# EAGLE board Alarmanlage_V40 (EAGLE 6.5.0)
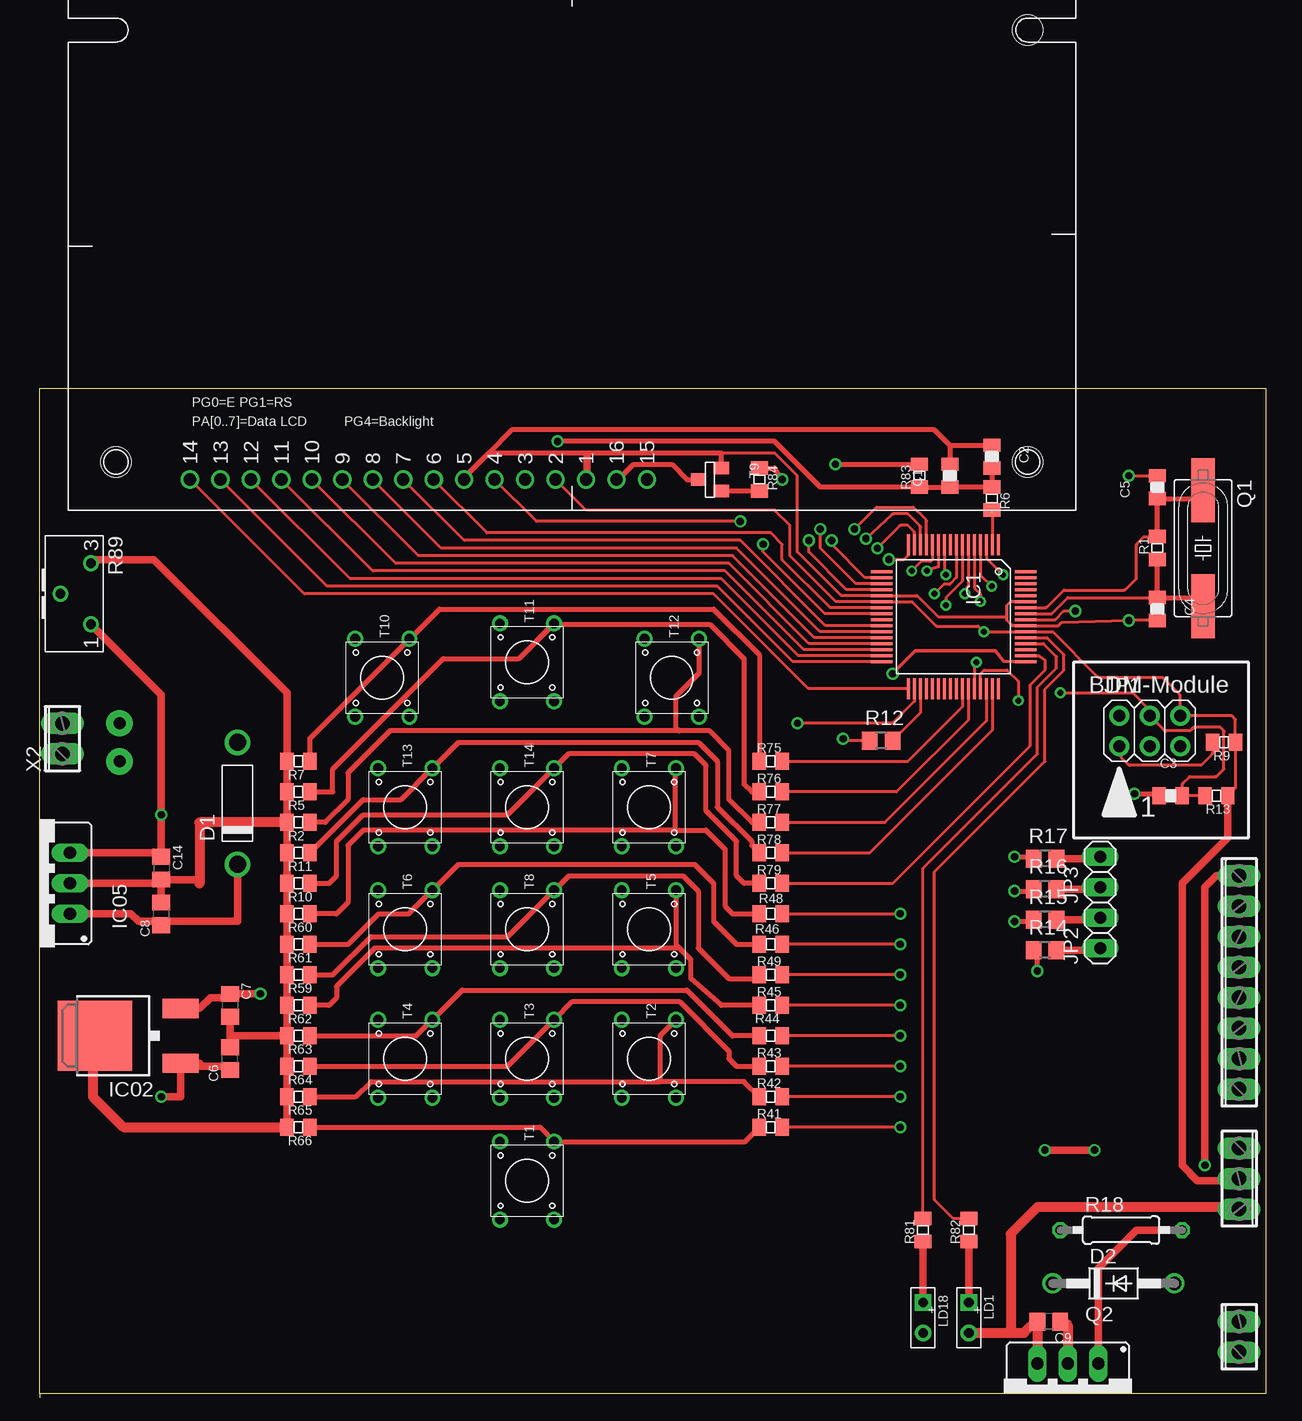
[diagram p0: board, top side]
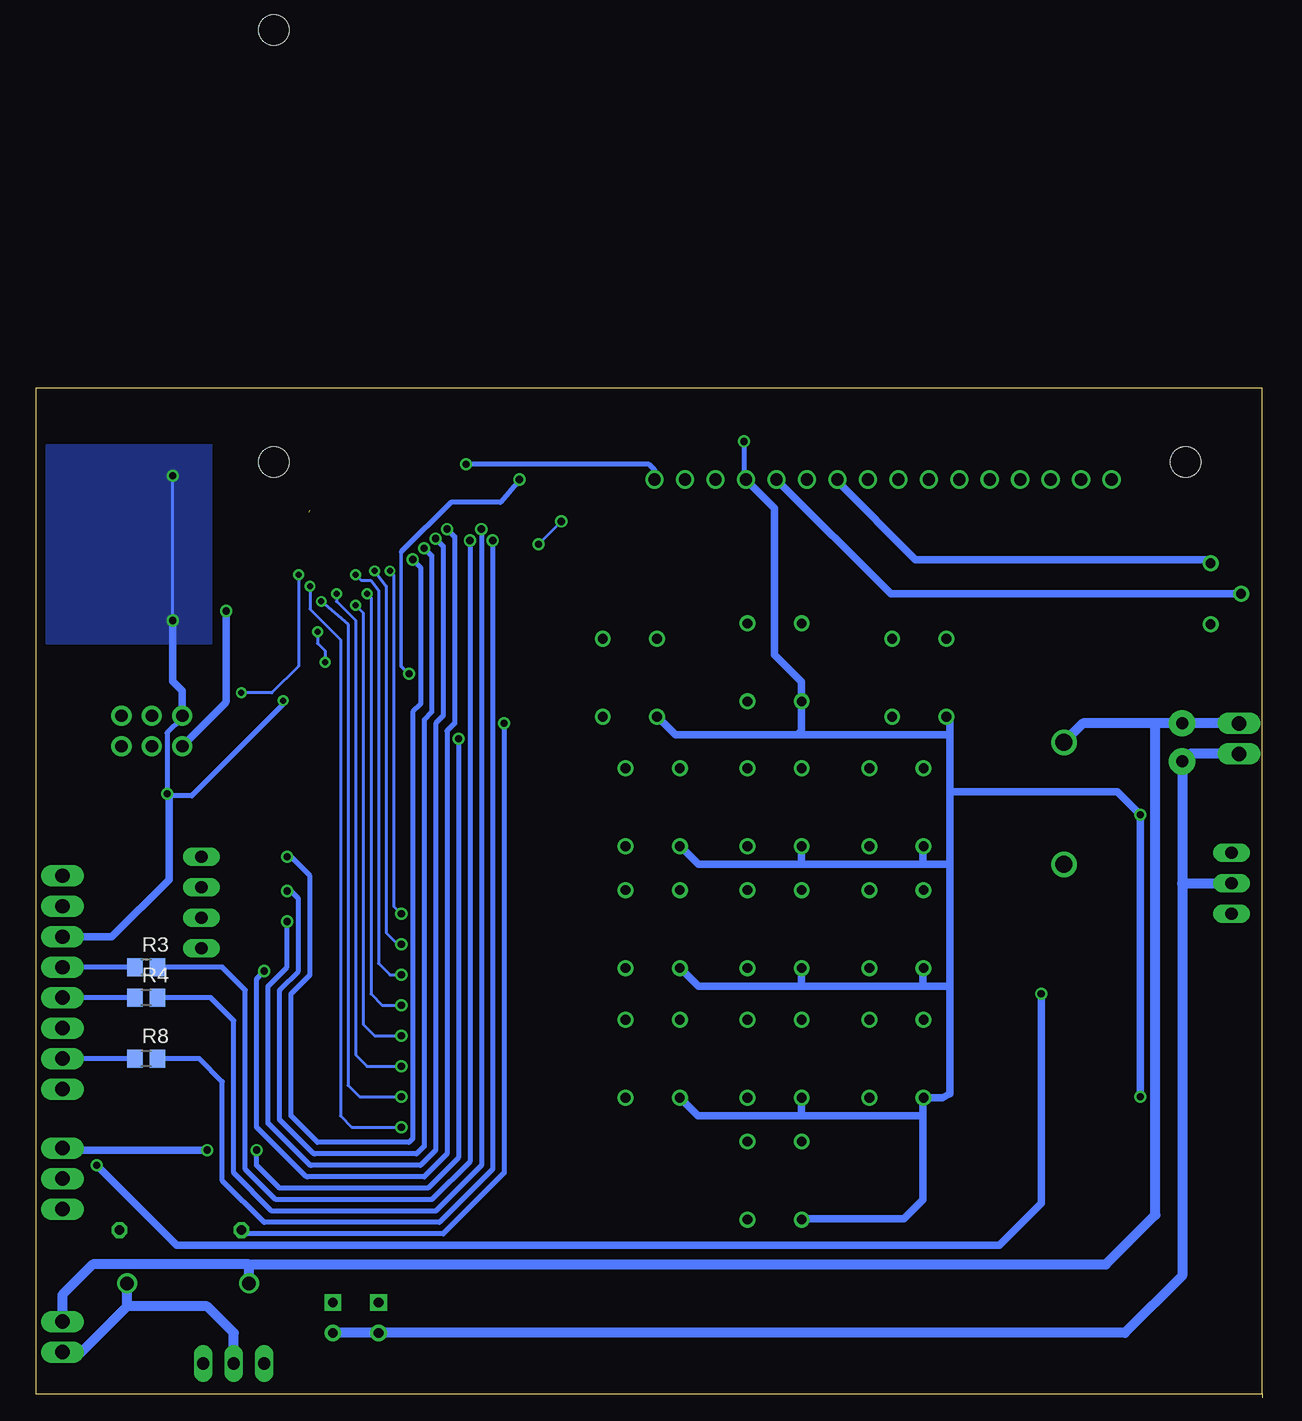
[diagram p1: board, bottom side, seen from below]

No outline drawn. Coordinates in mm, seen from the top.
Copper layers (1*16): Top 0.035mm / dielectric 1.5mm / Bottom 0.035mm
Design rules "default": minimum track width 10mil, minimum drill 24mil, track to track 8mil, track to pad 8mil, pad to pad 8mil, via to via 8mil, smd to smd 8mil, copper to edge 40mil, drill to drill 8mil, minimum pad ring 10mil, minimum via ring 8mil, stop-mask expansion 4mil, vias tented up to drill 0mil, thermal gap 10mil
Milling: 5 lines

## Footprints (pad centres in the part's own frame; a part is rotated, then mirrored left to right if it is on the bottom)
0805F = smd 1.118 x 1.422: 1 -0.953,0; 2 0.953,0
C0805 = smd 1.3 x 1.5: 1 -0.95,0; 2 0.95,0
DO201 = drill 1.422: A 5.08,0; K -5.08,0
DO41-10 = drill 1.118: A 5.08,0; C -5.08,0
LQFP64 = smd 1.778 x 0.254: 1 -6,3.75; 2 -6,3.25; 3 -6,2.75; 4 -6,2.25; 5 -6,1.75; 6 -6,1.25; 7 -6,0.75; 8 -6,0.25; 9 -6,-0.25; 10 -6,-0.75; 11 -6,-1.25; 12 -6,-1.75; 13 -6,-2.25; 14 -6,-2.75; 15 -6,-3.25; 16 -6,-3.75; 33 6,-3.75; 34 6,-3.25; 35 6,-2.75; 36 6,-2.25; 37 6,-1.75; 38 6,-1.25; 39 6,-0.75; 40 6,-0.25; 41 6,0.25; 42 6,0.75; 43 6,1.25; 44 6,1.75; 45 6,2.25; 46 6,2.75; 47 6,3.25; 48 6,3.75 | smd 0.254 x 1.778: 17 -3.75,-6; 18 -3.25,-6; 19 -2.75,-6; 20 -2.25,-6; 21 -1.75,-6; 22 -1.25,-6; 23 -0.75,-6; 24 -0.25,-6; 25 0.25,-6; 26 0.75,-6; 27 1.25,-6; 28 1.75,-6; 29 2.25,-6; 30 2.75,-6; 31 3.25,-6; 32 3.75,-6; 49 3.75,6; 50 3.25,6; 51 2.75,6; 52 2.25,6; 53 1.75,6; 54 1.25,6; 55 0.75,6; 56 0.25,6; 57 -0.25,6; 58 -0.75,6; 59 -1.25,6; 60 -1.75,6; 61 -2.25,6; 62 -2.75,6; 63 -3.25,6; 64 -3.75,6
DPACK = smd 1.6 x 3: 1 -2.28,-4.8; 3 2.28,-4.8 | smd 5.8 x 6.2: 4 0,2.38
TO-220_V = drill 1.016 long: GND 0,-2.54; IN -2.54,-2.54; OUT 2.54,-2.54
2X03 = drill 1.016 pad 1.676: 1 -2.54,-1.27; 2 -2.54,1.27; 3 0,-1.27; 4 0,1.27; 5 2.54,-1.27; 6 2.54,1.27
1X02 = drill 1.016 long: 1 -1.27,0; 2 1.27,0
LED2X5MM = drill 0.813 pad 1.397: 1 1.27,0 | drill 0.813 pad 1.397 square: 2 -1.27,0
HC49UP = smd 5.334 x 1.93: 1 -4.826,0; 2 4.826,0
0805 = smd 1.118 x 1.422: 1 -0.953,0; 2 0.953,0
R0805 = smd 1.3 x 1.5: 1 -0.95,0; 2 0.95,0
0207/10 = drill 0.813 octagon: 1 -5.08,0; 2 5.08,0
S63X = drill 0.813: 1 2.54,0; 2 0,-2.54; 3 -2.54,0
TASTE_THT = drill 0.813: A1 -3.251,2.261; A2 3.251,2.261; B1 -3.251,-2.261; B2 3.251,-2.261
SOT-23 = smd 1.016 x 1.27: 1 -0.953,0.953; 2 0.953,0.953; 3 0,-0.953
8POL254 = drill 1.2 long: 1 -8.89,0; 2 -6.35,0; 3 -3.81,0; 4 -1.27,0; 5 1.27,0; 6 3.81,0; 7 6.35,0; 8 8.89,0
2POL254 = drill 1.2 long: 1 -1.27,0; 2 1.27,0
3POL254 = drill 1.2 long: 1 -2.54,0; 2 0,0; 3 2.54,0
FDCC1602E = drill 1.016: 1 43.18,2.54; 2 40.64,2.54; 3 38.1,2.54; 4 35.56,2.54; 5 33.02,2.54; 6 30.48,2.54; 7 27.94,2.54; 8 25.4,2.54; 9 22.86,2.54; 10 20.32,2.54; 11 17.78,2.54; 12 15.24,2.54; 13 12.7,2.54; 14 10.16,2.54; 15 48.26,2.54; 16 45.72,2.54 | hole 2.54: 4,4; 80,4; 80,40

## Placement (x,y rotation side)
C1  100nF  [0805F]  76.52,76.83 90 top
C2  100nF  [0805F]  80.01,78.42 270 top
C3  100nF  [0805F]  94.93,50.16 0 top
C4  10pF  [0805F]  93.82,65.72 270 top
C5  10pF  [0805F]  93.82,75.88 90 top
C6  330nF  [C0805]  16.51,28.26 90 top
C7  100nF  [C0805]  16.51,32.7 270 top
C8  330nF  [C0805]  10.79,40.32 90 top
C9  100nF  [C0805]  84.77,6.35 180 top
C14  100nF  [C0805]  10.79,44.13 270 top
D1  1N4007  [DO201]  17.14,49.53 90 top
D2  1N4004  [DO41-10]  90.17,9.53 0 top
IC1  MC9S08AW60  [LQFP64]  76.83,65.09 270 top
IC02  3.3V  [DPACK]  7.62,30.16 90 top
IC05  5V  [TO-220_V]  0.64,42.86 90 top
JP1  [2X03]  93.19,55.56 0 top
JP2  [1X02]  89.06,38.73 90 top
JP3  [1X02]  89.06,43.81 90 top
LD1  GREEN  [LED2X5MM]  78.11,6.67 270 top
LD18  RED  [LED2X5MM]  74.3,6.67 270 top
Q1  4M9152  [HC49UP]  97.63,70.8 270 top
Q2  P5N50D  [TO-220_V]  86.36,0.32 180 top
R1  1M  [0805]  93.82,70.8 270 top
R2  10k  [0805]  22.23,47.94 0 top
R3  [R0805]  93.66,35.88 180 bottom
R4  [R0805]  93.66,33.34 180 bottom
R5  10k  [0805]  22.23,50.48 0 top
R6  10k  [0805]  80.01,74.93 90 top
R7  10k  [0805]  22.23,53.02 0 top
R8  [R0805]  93.66,28.26 180 bottom
R9  10k  [0805]  99.38,54.61 0 top
R10  10k  [0805]  22.23,42.86 0 top
R11  10k  [0805]  22.23,45.4 0 top
R12  1k  [R0805]  70.8,54.77 180 top
R13  10k  [0805]  98.74,50.16 0 top
R14  1k  [R0805]  84.45,37.31 180 top
R15  1k  [R0805]  84.45,39.85 180 top
R16  1k  [R0805]  84.45,42.39 180 top
R17  1k  [R0805]  84.45,44.93 180 top
R18  [0207/10]  90.81,13.97 0 top
R41  1k  [0805]  61.59,22.54 180 top
R42  1k  [0805]  61.59,25.08 180 top
R43  1k  [0805]  61.59,27.62 180 top
R44  1k  [0805]  61.59,30.16 180 top
R45  1k  [0805]  61.59,32.7 180 top
R46  1k  [0805]  61.59,37.78 180 top
R48  1k  [0805]  61.59,40.32 180 top
R49  1k  [0805]  61.59,35.24 180 top
R59  10k  [0805]  22.23,35.24 0 top
R60  10k  [0805]  22.23,40.32 0 top
R61  10k  [0805]  22.23,37.78 0 top
R62  10k  [0805]  22.23,32.7 0 top
R63  10k  [0805]  22.23,30.16 0 top
R64  10k  [0805]  22.23,27.62 0 top
R65  10k  [0805]  22.23,25.08 0 top
R66  10k  [0805]  22.23,22.54 0 top
R75  1k  [0805]  61.59,53.02 180 top
R76  1k  [0805]  61.59,50.48 180 top
R77  1k  [0805]  61.59,47.94 180 top
R78  1k  [0805]  61.59,45.4 180 top
R79  1k  [0805]  61.6,42.87 180 top
R81  1k  [0805]  74.3,13.97 270 top
R82  1k  [0805]  78.11,13.97 270 top
R83  100R  [0805]  73.98,76.83 270 top
R84  1k  [0805]  60.64,76.52 90 top
R89  10k  [S63X]  4.92,66.99 270 top
T1  [TASTE_THT]  41.27,18.1 90 top
T2  [TASTE_THT]  51.44,28.26 90 top
T3  [TASTE_THT]  41.27,28.26 90 top
T4  [TASTE_THT]  31.11,28.26 90 top
T5  [TASTE_THT]  51.44,39.05 90 top
T6  [TASTE_THT]  31.11,39.05 90 top
T7  [TASTE_THT]  51.44,49.21 90 top
T8  [TASTE_THT]  41.27,39.05 90 top
T9  [SOT-23]  56.52,76.52 270 top
T10  [TASTE_THT]  29.21,60.01 90 top
T11  [TASTE_THT]  41.27,61.28 90 top
T12  [TASTE_THT]  53.34,60.01 90 top
T13  [TASTE_THT]  31.11,49.21 90 top
T14  [TASTE_THT]  41.27,49.21 90 top
X1  [8POL254]  100.65,34.61 90 top
X2  [2POL254]  2.54,54.93 90 top
X3  [2POL254]  100.65,5.08 90 top
X4  [3POL254]  100.65,18.26 270 top
X10  [FDCC1602E]  3.02,73.98 0 top

## Library data of the parts
C1-C5 D1 LD1 LD18 R1 R2 R5-R7 R9-R11 R13 R41-R46 R48 R49 R59-R66 R75-R79 R81-R84 T1-T14 = deto
C6-C9 C14 D2 IC05 Q2 R3 R4 R8 R12 R14-R18 = lib_valentin_bernard
IC1 = MOTOROLA
IC02 = v-reg
JP1-JP3 = pinhead
Q1 = crystal
R89 = pot
X1-X4 = con-phoenix-254; OC_FARNELL: unknown; OC_NEWARK: unknown
X10 = DISP-LCD

## Nets
+3V3: C7.1 IC02.3 X1.8
+5V: C1.1 C2.2 C6.1 C14.1 IC1.22 IC1.44 IC1.54 IC02.1 IC05.OUT JP1.6 R6.2 R9.2 R13.2 R83.2 R89.1 T1.A1 T2.A1 T3.A1 T4.A1 T5.A1 T6.A1 T7.A1 T8.A1 T10.A1 T11.A1 T12.A1 T13.A1 T14.A1 X4.2 X10.2
+12V: D1.A D2.C X2.2 X3.2
BKGD: IC1.56 JP1.1 R9.1
D0: IC1.26 X10.7
D1: IC1.27 X10.8
D2: IC1.28 X10.9
D3: IC1.29 X10.10
GND: C1.2 C2.1 C3.1 C4.2 C5.2 C6.2 C7.2 C8.2 C9.2 C14.2 IC1.21 IC1.45 IC1.55 IC1.59 IC02.4 IC05.GND JP1.2 LD1.1 LD18.1 Q2.OUT R2.1 R5.1 R7.1 R10.1 R11.1 R59.1 R60.1 R61.1 R62.1 R63.1 R64.1 R65.1 R66.1 R89.3 T9.1 X1.6 X2.1 X4.3 X10.1 X10.5
IRQ: IC1.2 R6.1
LCD_LED: IC1.49 R84.2
N$1: R3.2 X1.5
N$2: C8.1 D1.K IC05.IN
N$3: IC1.20 R8.1
N$4: IC1.42 R75.1
N$5: IC1.19 R4.1
N$6: IC1.18 R3.1
N$8: IC1.43 R76.1
N$9: IC1.46 R77.1
N$10: IC1.47 R78.1
N$11: R49.2 R59.2 T8.B2
N$12: IC1.50 R79.1
N$14: R7.2 R75.2 T10.B2
N$15: R4.2 X1.4
N$16: C4.1 IC1.57 Q1.2 R1.2
N$17: IC1.52 R81.1
N$18: IC1.53 R82.1
N$19: R8.2 X1.2
N$20: R5.2 R76.2 T11.B2
N$21: IC1.12 R48.1
N$22: C5.1 IC1.58 Q1.1 R1.1
N$23: IC1.11 R46.1
N$24: IC1.4 R41.1
N$25: R12.2 X4.1
N$26: LD1.2 R82.2
N$27: IC1.13 R14.2
N$28: C9.1 D2.A Q2.GND X3.1
N$29: R11.2 R78.2 T13.B2
N$30: LD18.2 R81.2
N$31: IC1.35 R12.1
N$32: IC1.14 R15.2
N$33: R10.2 R79.2 T14.B2
N$34: IC1.15 R16.2
N$35: R45.2 R62.2 T5.B2
N$36: IC1.34 R18.1
N$37: R48.2 R60.2 T7.B2
N$38: IC1.16 R17.2
N$39: JP2.1 R14.1
N$40: JP2.2 R15.1
N$41: JP3.1 R16.1
N$42: IC1.10 R49.1
N$43: JP3.2 R17.1
N$44: Q2.IN R18.2
N$45: IC1.5 R42.1
N$46: IC1.6 R43.1
N$47: IC1.7 R44.1
N$48: IC1.8 R45.1
N$49: IC1.30 X10.11
N$50: IC1.31 X10.12
N$51: IC1.32 X10.13
N$52: IC1.33 X10.14
N$55: IC1.23 X10.6
N$58: IC1.24 X10.4
N$60: R89.2 X10.3
N$63: R46.2 R61.2 T6.B2
N$66: R44.2 R63.2 T4.B2
N$67: R43.2 R64.2 T3.B2
N$68: R42.2 R65.2 T2.B2
N$69: R41.2 R66.2 T1.B2
N$72: R2.2 R77.2 T12.B2
N$86: R83.1 X10.15
N$87: T9.3 X10.16
N$88: R84.1 T9.2
RESET: C3.2 IC1.3 JP1.4 R13.1

## Tracks (layer width: path | path; a pad name or v marks a point on that pad's centre or on a via)
+3V3  (via drill 0.6)
  Top 0.254: 16.51,33.34 C7.1
  Top 0.61: IC02.3 13.97,32.44 14.92,33.34 16.51,33.34 | C7.1 v19.05,33.65 v19.05,33.66 | v97.79,19.37 97.79,42.55 98.74,43.5 X1.8
  Bottom 0.61: v19.05,33.66 19.05,16.19 22.54,12.7 91.12,12.7 v97.79,19.37
+5V  (via drill 0.5, 0.6)
  Top 0.254: X10.2 46.2,73.98 61.91,73.98 63.18,72.71 63.18,70.17 67.01,66.34 IC1.22 73.36,66.34 75.41,64.29 78.9,64.29 v79.38,63.82 82.81,63.82 IC1.54 | JP1.6 100.01,56.83 100.33,56.52 R9.2 100.33,50.91 arc-45 100.26,50.73 R13.2 | JP1.6 | IC1.54 83.14,63.84 | JP1.6 95.73,58.47 arc45 95.65,58.65 94.3,60.01 89,60.01 arc-45 88.83,60.08 85.09,63.82 arc45 85.04,63.84 IC1.54 | v78.74,61.28 78.58,61.12 IC1.44
  Top 0.406: v43.81,79.69 61.91,79.69 65.72,75.88 R83.2 C1.1 R6.2 C2.2
  Top 0.61: IC05.OUT 10.79,45.4 C14.1 v10.79,48.58 10.79,58.58 R89.1 | v10.79,25.08 12.42,25.08 IC02.1 13.97,27.88 13.97,27.62 16.51,27.62 C6.1 | R13.2 99.69,46.67 95.89,42.86 95.89,19.37 97.16,18.1 100.17,18.1 X4.2
  Bottom 0.254: v79.38,63.82 79.38,62.87 78.74,62.23 v78.74,61.28
  Bottom 0.406: v43.81,79.69 43.81,76.68 X10.2
  Bottom 0.61: 10.79,25.01 v10.79,25.08 v10.79,48.58 12.7,50.48 26.67,50.48 | 39.05,23.5 39.01,23.5 | 39.01,23.5 T3.A1 39.05,25.01 39.05,23.5 | 39.01,23.5 28.89,23.5 | T1.A1 38.81,14.85 38.73,14.92 30.48,14.92 28.89,16.51 28.89,23.5 | 39.05,23.5 47.66,23.5 T2.A1 | T5.A1 49.14,35.8 47.62,34.29 39.05,34.29 | 39.05,34.29 39.05,35.76 T8.A1 | 39.05,34.29 28.89,34.29 | 28.89,34.29 28.89,35.76 T6.A1 | T7.A1 49.14,45.96 47.62,44.45 39.05,44.45 | 39.05,44.45 39.05,45.92 T14.A1 | 39.05,44.45 28.89,44.45 | 28.89,44.45 28.89,45.92 T13.A1 | 28.89,34.29 26.67,34.29 | 26.67,34.29 26.67,25.32 27.3,25.01 T4.A1 28.89,24.97 28.89,23.5 | 28.89,44.45 26.67,44.45 | T10.A1 26.91,56.76 26.67,56.52 26.67,55.24 | 26.67,55.24 26.67,50.48 | 26.67,50.48 26.67,44.45 | T12.A1 51.04,56.76 49.53,55.24 39.37,55.24 | 39.37,55.24 26.67,55.24 | 39.37,55.24 39.01,55.6 T11.A1 39.01,59.65 41.27,61.91 41.27,74.14 X10.2 | 26.67,34.29 26.67,44.45
+12V  (via drill 1 pad 2.18)
  Bottom 0.813: X2.2 v7.3,56.2 9.53,56.2 | 9.53,56.2 15.56,56.2 D1.A | 85.09,11.11 13.65,11.11 9.53,15.24 9.53,56.2 | D2.C 85.09,11.11 | 85.09,11.11 98.11,11.11 100.65,8.57 X3.2
BKGD  (via drill 0.6)
  Top 0.254: R9.1 98.42,53.76 arc-45 98.35,53.58 97.47,52.7 91.55,52.7 arc-45 91.37,52.78 90.81,53.34 90.81,54.03 arc45 90.73,54.21 JP1.1 | IC1.56 85.32,64.84 86.04,65.56 v87,65.56
  Bottom 0.254: 87,58.05 arc45 87.07,57.87
  Bottom 0.61: v87,65.56 87,58.05 | 87.07,57.87 JP1.1
D0
  Top 0.254: IC1.26 66.16,64.34 59.05,71.44 36.04,71.44 X10.7
D1
  Top 0.254: IC1.27 65.7,63.84 58.74,70.8 34.13,70.8 X10.8
D2
  Top 0.254: IC1.28 65.25,63.34 58.42,70.17 32.23,70.17 X10.9
D3
  Top 0.254: IC1.29 64.8,62.84 58.1,69.53 30.32,69.53 X10.10
GND  (via drill 0.5, 0.6, 1 pad 2.18)
  Top 0.254: 57.47,78.74 61.91,78.74 63.82,76.83 63.82,70.48 67.47,66.84 IC1.21 73.81,66.84 75.56,65.09 81.28,65.09 | C4.2 v91.44,64.77 | v91.44,64.77 arc45 v91.44,64.77 | v91.44,76.83 C5.2 | C5.2 arc45 C5.2 | v91.44,64.77 85.83,64.61 85.56,64.34 IC1.55 81.82,64.34 arc-45 81.64,64.41 81.28,64.77 81.28,65.09 | v91.44,64.77 arc-45 v91.44,64.77 | 81.76,66.36 82.79,66.36 arc-45 IC1.59 82.81,66.36 81.6,66.36 81.28,66.04 81.28,65.09 | IC1.45 79.08,60.35 79.38,60.64 81.28,60.64 82.23,59.69 v82.23,58.1
  Top 0.406: 10.79,42.86 C14.2 | X10.5 36.04,76.68 38.1,78.74 | 38.1,78.74 46.35,78.74 | 46.35,78.74 46.35,76.68 X10.1 46.2,78.58 46.35,78.74 | 46.35,78.74 57.47,78.74 T9.1 | 38.1,78.74 40.01,80.64 75.25,80.64 76.52,79.38 | 76.52,79.38 C1.2 | v91.92,50.32 93.72,50.32 arc-45 93.9,50.25 C3.1 | 76.52,79.38 C2.1
  Top 0.61: IC05.GND 10.79,42.86 | C8.2 C14.2 13.97,43.18 13.97,42.86 | R66.1 R65.1 R64.1 R63.1 | R63.1 R62.1 R59.1 R61.1 R60.1 R10.1 R11.1 R2.1 R5.1 R7.1 21.27,58.74 10.16,69.85 5.24,69.85 R89.3 | C6.2 16.51,30.16 | C7.2 16.51,30.16 | 16.51,30.16 R63.1
  Top 0.813: R2.1 13.97,47.94 13.97,42.86 | IC02.4 5.08,30.16 5.08,25.08 7.62,22.54 R66.1 | LD1.1 81.92,5.4 | 81.92,5.4 82.71,5.4 83.82,6.51 C9.2 Q2.OUT | X4.3 100.49,15.72 100.33,15.88 83.82,15.88 81.6,13.65 81.6,5.71 81.92,5.4
  Bottom 0.254: v91.44,64.77 v91.44,76.83
  Bottom 0.406: JP1.2 90.65,56.78 arc45 90.72,56.6 91.92,55.4 v91.92,50.32 | v82.23,58.1 82.23,57.78 89.85,50.16 91.76,50.16
  Bottom 0.61: X10.5 36.04,76.36 29.53,69.85 5.24,69.85 R89.3 | JP1.2 90.65,58.79 arc-45 90.72,58.97 91.44,59.69 v91.44,64.77 | X1.6 96.52,38.42 91.76,43.18 91.76,50.16 v91.92,50.32
  Bottom 0.813: X2.1 6.67,53.66 v7.3,53.02 7.3,42.86 | 7.3,42.86 IC05.GND | 7.3,42.86 7.3,10.16 12.06,5.4 LD18.1 LD1.1
  pour Bottom: 88.27,79.38 88.27,62.87 101.92,62.87 101.92,79.38
IRQ  (1 unrouted)
  Top 0.254: 80.08,73.8 IC1.2
LCD_LED  (via drill 0.6)
  Top 0.254: IC1.49 81.02,61.34 80.96,61.44
  Top 0.305: v71.75,60.33 73.66,62.23 80.33,62.23 80.96,61.44
  Top 0.406: R84.2 61.91,77.47 v62.55,76.52
  Bottom 0.305: 72.39,70.48 72.39,60.96 v71.75,60.33
  Bottom 0.406: v62.55,76.52 64.14,74.61 68.26,74.61 72.39,70.48
N$1
  Bottom 0.406: R3.2 X1.5
N$2
  Top 0.406: 10.79,39.69 C8.1
  Top 0.61: IC05.IN 8.26,40.32 8.89,39.69 10.79,39.69 17.14,39.69 D1.K
N$3  (via drill 0.6)
  Top 0.254: IC1.20 67.92,67.34 64.77,70.48 v64.77,71.44
  Bottom 0.406: v64.77,71.44 64.77,19.05 69.22,14.61 83.82,14.61 87.31,18.1 87.31,26.35 89.22,28.26 R8.1
N$4
  Top 0.254: R75.1 73.03,53.02 77.58,57.58 IC1.42
N$5  (via drill 0.6)
  Top 0.254: IC1.19 68.69,67.84 65.72,70.8 v65.72,72.39
  Bottom 0.406: v65.72,72.39 65.72,19.37 69.53,15.56 83.19,15.56 86.36,18.73 86.36,31.43 88.27,33.34 R4.1
N$6  (via drill 0.6)
  Top 0.254: IC1.18 69.46,68.34 66.67,71.12 v66.67,71.44
  Bottom 0.406: v66.67,71.44 66.67,19.68 69.85,16.51 82.87,16.51 85.41,19.05 85.41,33.97 87.31,35.88 R3.1
N$8
  Top 0.254: IC1.43 78.08,56.53 78.11,56.52 72.07,50.48 R76.1
N$9
  Top 0.254: R77.1 71.12,47.94 79.58,56.41 IC1.46
N$10
  Top 0.254: R78.1 69.85,45.4 80.08,55.64 IC1.47
N$11
  Top 0.406: R59.2 25.08,35.24 28.26,38.42 39.65,38.42 T8.B2 43.57,42.3 44.77,43.5 54.29,43.5 55.56,42.23 55.56,37.47 58.1,34.92 60.33,34.92 R49.2
N$12
  Top 0.254: R79.1 71.76,42.87 83.19,54.29 83.19,59.37 84.45,60.64 84.45,61.44 83.9,61.84 IC1.50
N$14
  Top 0.406: R7.2 23.18,54.97 T10.B2 31.51,63.26 33.97,65.72 56.83,65.72 60.64,61.91 R75.2
N$15
  Bottom 0.406: R4.2 X1.4
N$16
  Top 0.254: IC1.57 85.02,65.34 86.36,66.67 C4.1 | C4.1 arc45 C4.1
  Top 0.406: Q1.2 97.63,66.99 97.47,66.99 97.47,66.67 C4.1 R1.2
N$17
  Top 0.254: R81.1 74.3,44.13 83.82,53.66 83.82,59.21 85.41,60.8 85.41,61.75 84.32,62.84 IC1.52
N$18
  Top 0.254: R82.1 76.83,14.92 75.25,16.51 75.25,43.81 84.45,53.02 84.45,59.05 86.04,60.64 86.04,61.91 84.62,63.34 IC1.53
N$19
  Bottom 0.406: R8.2 X1.2
N$20
  Top 0.406: R5.2 25.08,50.48 25.08,52.39 34.29,61.59 40.6,61.59 | 40.6,61.59 T11.B2 | R76.2 60.01,50.48 59.37,51.12 59.37,61.59 56.52,64.45 43.5,64.45 40.6,61.59
N$21  (via drill 0.5, 0.6)
  Top 0.254: IC1.12 75.09,69.85 74.93,69.69 74.14,69.69 v73.34,68.9 | R48.1 v72.39,40.32
  Bottom 0.254: v73.34,68.9 73.03,68.58 73.03,40.96 v72.39,40.32
N$22
  Top 0.254: IC1.58 84.47,65.84 arc45 84.64,65.91 86.04,67.31 91.02,67.31 arc45 91.2,67.38 92.08,68.26 92.08,71.02 arc-45 92.15,71.19 92.71,71.75 R1.1 | R1.1 arc45 R1.1
  Top 0.406: R1.1 C5.1 97.63,74.93 Q1.1
N$23  (via drill 0.5, 0.6)
  Top 0.254: IC1.11 75.58,69.23 v74.61,68.9 | v72.39,37.78 R46.1
  Bottom 0.254: v74.61,68.9 73.66,67.63 73.66,38.73 72.71,37.78 v72.39,37.78
N$24  (via drill 0.5, 0.6)
  Top 0.254: IC1.4 79.08,68.55 v80.01,67.63 | v72.39,22.54 R41.1
  Bottom 0.254: v80.01,67.63 80.01,65.72 77.47,63.18 77.47,23.5 76.52,22.54 v72.39,22.54
N$25  (via drill 0.6)
  Top 0.254: R12.2 67.79,54.77 v67.63,54.93
  Top 0.61: v84.45,20.64 v88.58,20.64
  Bottom 0.406: v67.63,54.93 67.63,20 70.17,17.46 82.55,17.46 84.45,19.37 v84.45,20.64
  Bottom 0.61: v88.58,20.64 100.33,20.64 100.49,20.8 X4.1
N$26
  Top 0.61: LD1.2 R82.2
N$27  (via drill 0.6)
  Top 0.254: IC1.13 74.58,73.01 arc45 74.51,73.19 73.48,74.22 70.41,74.22 v68.58,72.39
  Top 0.406: v83.82,35.56 83.82,36.89 arc45 83.75,37.07 R14.2
  Bottom 0.406: v68.58,72.39 67.94,71.75 67.94,56.2 68.58,55.56 68.58,20.32 70.48,18.41 80.22,18.41 arc45 80.4,18.49 84.45,22.54 84.45,34.82 arc45 84.38,35 v83.82,35.56
N$28
  Top 0.813: C9.1 86.04,6.35 86.36,6.03 Q2.GND
  Bottom 0.813: Q2.GND 86.36,5.4 88.58,7.62 95.25,7.62 | 95.25,7.62 D2.A | X3.1 99.06,3.81 95.25,7.62
N$29
  Top 0.406: R11.2 27.62,49.85 30.76,49.85 T13.B2 33.41,52.46 35.56,54.61 55.56,54.61 57.15,53.02 57.15,49.21 60.01,46.35 60.01,46.04 R78.2
N$30
  Top 0.61: LD18.2 R81.2
N$31
  Top 0.254: IC1.35 74.08,57.1 R12.1
N$32  (via drill 0.6)
  Top 0.254: IC1.14 74.08,72.5 arc45 74.01,72.67 73.03,73.66 71.86,73.66 arc45 71.68,73.59 v69.53,71.6
  Top 0.406: v81.92,39.69 83.24,39.69 arc45 83.42,39.76 R15.2
  Bottom 0.406: v69.53,71.6 68.9,70.96 68.9,56.83 69.53,56.2 69.53,20.64 70.8,19.37 79.91,19.37 arc45 80.08,19.44 83.5,22.86 83.5,34.19 arc45 83.43,34.36 81.92,35.88 v81.92,39.69
N$33
  Top 0.406: R10.2 24.77,42.86 25.4,43.5 25.4,46.35 27.62,48.58 39.65,48.58 T14.B2 44.73,53.66 55.24,53.66 56.2,52.7 56.2,48.9 58.74,46.35 58.74,43.5 59.37,42.87 R79.2
N$34  (via drill 0.6)
  Top 0.254: IC1.15 73.58,72.04 arc45 73.51,72.22 73.03,72.71 72.5,72.71 arc45 72.32,72.63 v70.48,70.8
  Top 0.406: v81.92,42.23 83.24,42.23 arc45 83.42,42.3 R16.2
  Bottom 0.406: v70.48,70.8 69.85,70.17 69.85,57.15 70.48,56.52 70.48,20.95 71.12,20.32 79.59,20.32 arc45 79.77,20.39 82.55,23.18 82.55,33.87 arc45 82.48,34.05 80.96,35.56 80.96,41.49 arc-45 81.04,41.67 81.6,42.23 v81.92,42.23
N$35
  Top 0.406: R45.2 57.47,32.7 54.93,34.92 54.93,36.51 53.98,37.47 | 53.98,37.47 28.57,37.47 25.4,34.29 25.4,33.34 24.77,32.7 R62.2 | T5.B2 53.7,37.74 53.98,37.47
N$36  (via drill 0.6)
  Top 0.254: IC1.34 73.58,58.03 71.75,56.2 v63.82,56.2
  Bottom 0.406: v63.82,56.2 63.82,18.73 68.9,13.65 85.41,13.65 R18.1
N$37
  Top 0.406: 53.66,47.31 27.62,47.31 26.35,46.04 26.35,41.27 25.4,40.32 R60.2 | 53.66,47.31 53.66,52.43 T7.B2 | 53.66,47.31 56.2,47.31 57.78,45.72 57.78,40.96 58.42,40.32 R48.2
N$38  (via drill 0.6)
  Top 0.254: IC1.16 73.08,70.33 arc-45 73.01,70.15 72.71,69.85 v71.44,69.85
  Top 0.406: v81.92,45.09 83.35,45.09 R17.2
  Bottom 0.406: v71.44,69.85 70.8,69.22 70.8,57.78 71.44,57.15 71.44,21.59 71.75,21.27 79.38,21.27 81.6,23.5 81.6,33.66 80.01,35.24 80.01,43.5 81.6,45.09 v81.92,45.09
N$39
  Top 0.61: R14.1 88.9,37.31 JP2.1
N$40
  Top 0.61: R15.1 88.9,39.85 JP2.2
N$41
  Top 0.61: R16.1 88.9,42.39 JP3.1
N$42  (via drill 0.5, 0.6)
  Top 0.254: IC1.10 76.08,68.69 v76.2,68.58 | v72.39,35.24 R49.1
  Bottom 0.254: v76.2,68.58 75.72,68.1 74.93,68.1 74.3,67.31 74.3,36.2 73.34,35.24 v72.39,35.24
N$43
  Top 0.61: R17.1 88.9,44.93 JP3.2
N$44
  Top 0.61: R18.2 92.08,13.97 88.9,10.79 Q2.IN
N$45  (via drill 0.5, 0.6)
  Top 0.254: IC1.5 78.58,67.47 79.06,66.99 v79.06,66.36 | v72.39,25.08 R42.1
  Bottom 0.254: v79.06,66.36 76.83,64.45 76.83,26.04 75.88,25.08 v72.39,25.08
N$46  (via drill 0.5, 0.6)
  Top 0.254: IC1.6 78.08,67.61 77.79,67.31 v77.79,66.99 | v72.39,27.62 R43.1
  Bottom 0.254: v77.79,66.99 77.79,66.36 76.2,64.77 76.2,28.57 75.25,27.62 v72.39,27.62
N$47  (via drill 0.5, 0.6)
  Top 0.254: IC1.7 77.58,68.06 76.2,66.67 v76.2,66.04 | v72.39,30.16 R44.1
  Bottom 0.254: v76.2,66.04 75.56,65.41 75.56,31.11 74.61,30.16 v72.39,30.16
N$48  (via drill 0.5, 0.6)
  Top 0.254: IC1.8 77.08,68.35 76.52,67.79 76.04,67.79 v75.25,66.99 | v72.39,32.7 R45.1
  Bottom 0.254: v75.25,66.99 74.93,66.67 74.93,33.66 73.98,32.7 v72.39,32.7
N$49
  Top 0.254: IC1.30 64.34,62.34 57.78,68.9 28.42,68.9 X10.11
N$50
  Top 0.254: IC1.31 63.89,61.84 57.47,68.26 26.51,68.26 X10.12
N$51
  Top 0.254: IC1.32 63.44,61.34 57.15,67.63 24.61,67.63 X10.13
N$52
  Top 0.254: IC1.33 64.74,59.09 56.83,66.99 22.7,66.99 X10.14
N$55
  Top 0.254: IC1.23 66.56,65.84 62.55,69.85 62.55,71.12 61.59,72.07 37.94,72.07 X10.6
N$58  (via drill 0.6)
  Top 0.254: IC1.24 66.11,65.34 60.96,70.48 v60.96,71.12 | v59.05,73.03 42.07,73.03 X10.4
  Bottom 0.254: v60.96,71.12 v59.05,73.03
N$60
  Bottom 0.61: R89.2 31.59,66.99 X10.3
N$63
  Top 0.406: R61.2 26.35,37.78 28.89,40.32 31.39,40.32 T6.B2 33.41,42.3 35.56,44.45 55.24,44.45 56.83,42.86 56.83,39.69 58.74,37.78 R46.2
N$66
  Top 0.406: R63.2 32.03,30.16 T4.B2 33.41,31.51 35.88,33.97 54.61,33.97 58.42,30.16 R44.2
N$67
  Top 0.406: R64.2 39.65,27.62 T3.B2 43.57,31.51 45.09,33.02 53.98,33.02 58.1,28.89 58.1,28.26 58.74,27.62 R43.2
N$68
  Top 0.406: R65.2 26.99,25.08 28.26,26.35 52.39,26.35 | R42.2 59.37,26.35 52.39,26.35 | 52.39,26.35 52.39,30.2 T2.B2
N$69
  Top 0.406: R66.2 42.34,22.54 T1.B2 59.45,21.35 R41.2
N$72
  Top 0.406: R77.2 60.01,47.94 58.1,49.85 58.1,53.98 56.52,55.56 53.98,55.56 | 53.98,55.56 29.84,55.56 26.35,52.07 26.35,49.85 24.45,47.94 R2.2 | T12.B2 55.6,60.36 53.66,58.42 53.66,55.88 53.98,55.56
N$86  (via drill 0.6)
  Top 0.406: v66.99,77.79 R83.1
  Bottom 0.406: X10.15 51.28,77.31 51.75,77.79 v66.99,77.79
N$87
  Top 0.406: X10.16 48.74,76.36 50.16,77.79 53.34,77.79 54.61,76.52 T9.3
N$88
  Top 0.406: T9.2 R84.1
RESET  (via drill 0.5)
  Top 0.254: R13.1 C3.2 95.89,51.01 arc-45 95.96,51.19 96.52,51.75 98.64,51.75 arc45 98.82,51.83 99.38,52.39 99.38,55.46 arc45 99.3,55.64 99.06,55.88 96.94,55.88 arc45 96.76,55.81 96.52,55.56 94.56,55.56 arc-45 94.38,55.64 JP1.4 93.19,57.2 arc45 93.11,57.38 91.76,58.74 v85.72,58.74 | IC1.3 79.58,69.96 v80.96,68.58
  Bottom 0.254: v80.96,68.58 80.96,60.96 83.19,58.74 v85.72,58.74

## Text on the board
tPlace: PG0=E PG1=RS | PA[0..7]=Data LCD | PG4=Backlight | BDM-Module | 1
tValues: PD1 | PD0 | PD2 | +12V | GND | PD3 | PD4 | PF6 | PE3 | +3,3V | PE2 | Rx | PF5 | PF7 | PF4 | GND | Tx | ? | MISO | ? | MOSI | PF3 | PF2 | PF1 | ? | SCK | S_in | PF0 | +5V | GND | 0R? | Alarmanlage | +12V | Valentin Bernard / Klasse 5AEL GOB Meran / Schuljahr 2013/14